# Altium PCB Pcb_Mang_giao_thuc_Iot.pcbdoc
Units mil, origin at the board's own origin, x right, y up, seen from the top; angles counter-clockwise.
Board outline 2700 x 2885 mil, 2 copper layers (Top Layer, Bottom Layer); 14 components, 29 nets, 95 pads, 0 vias.
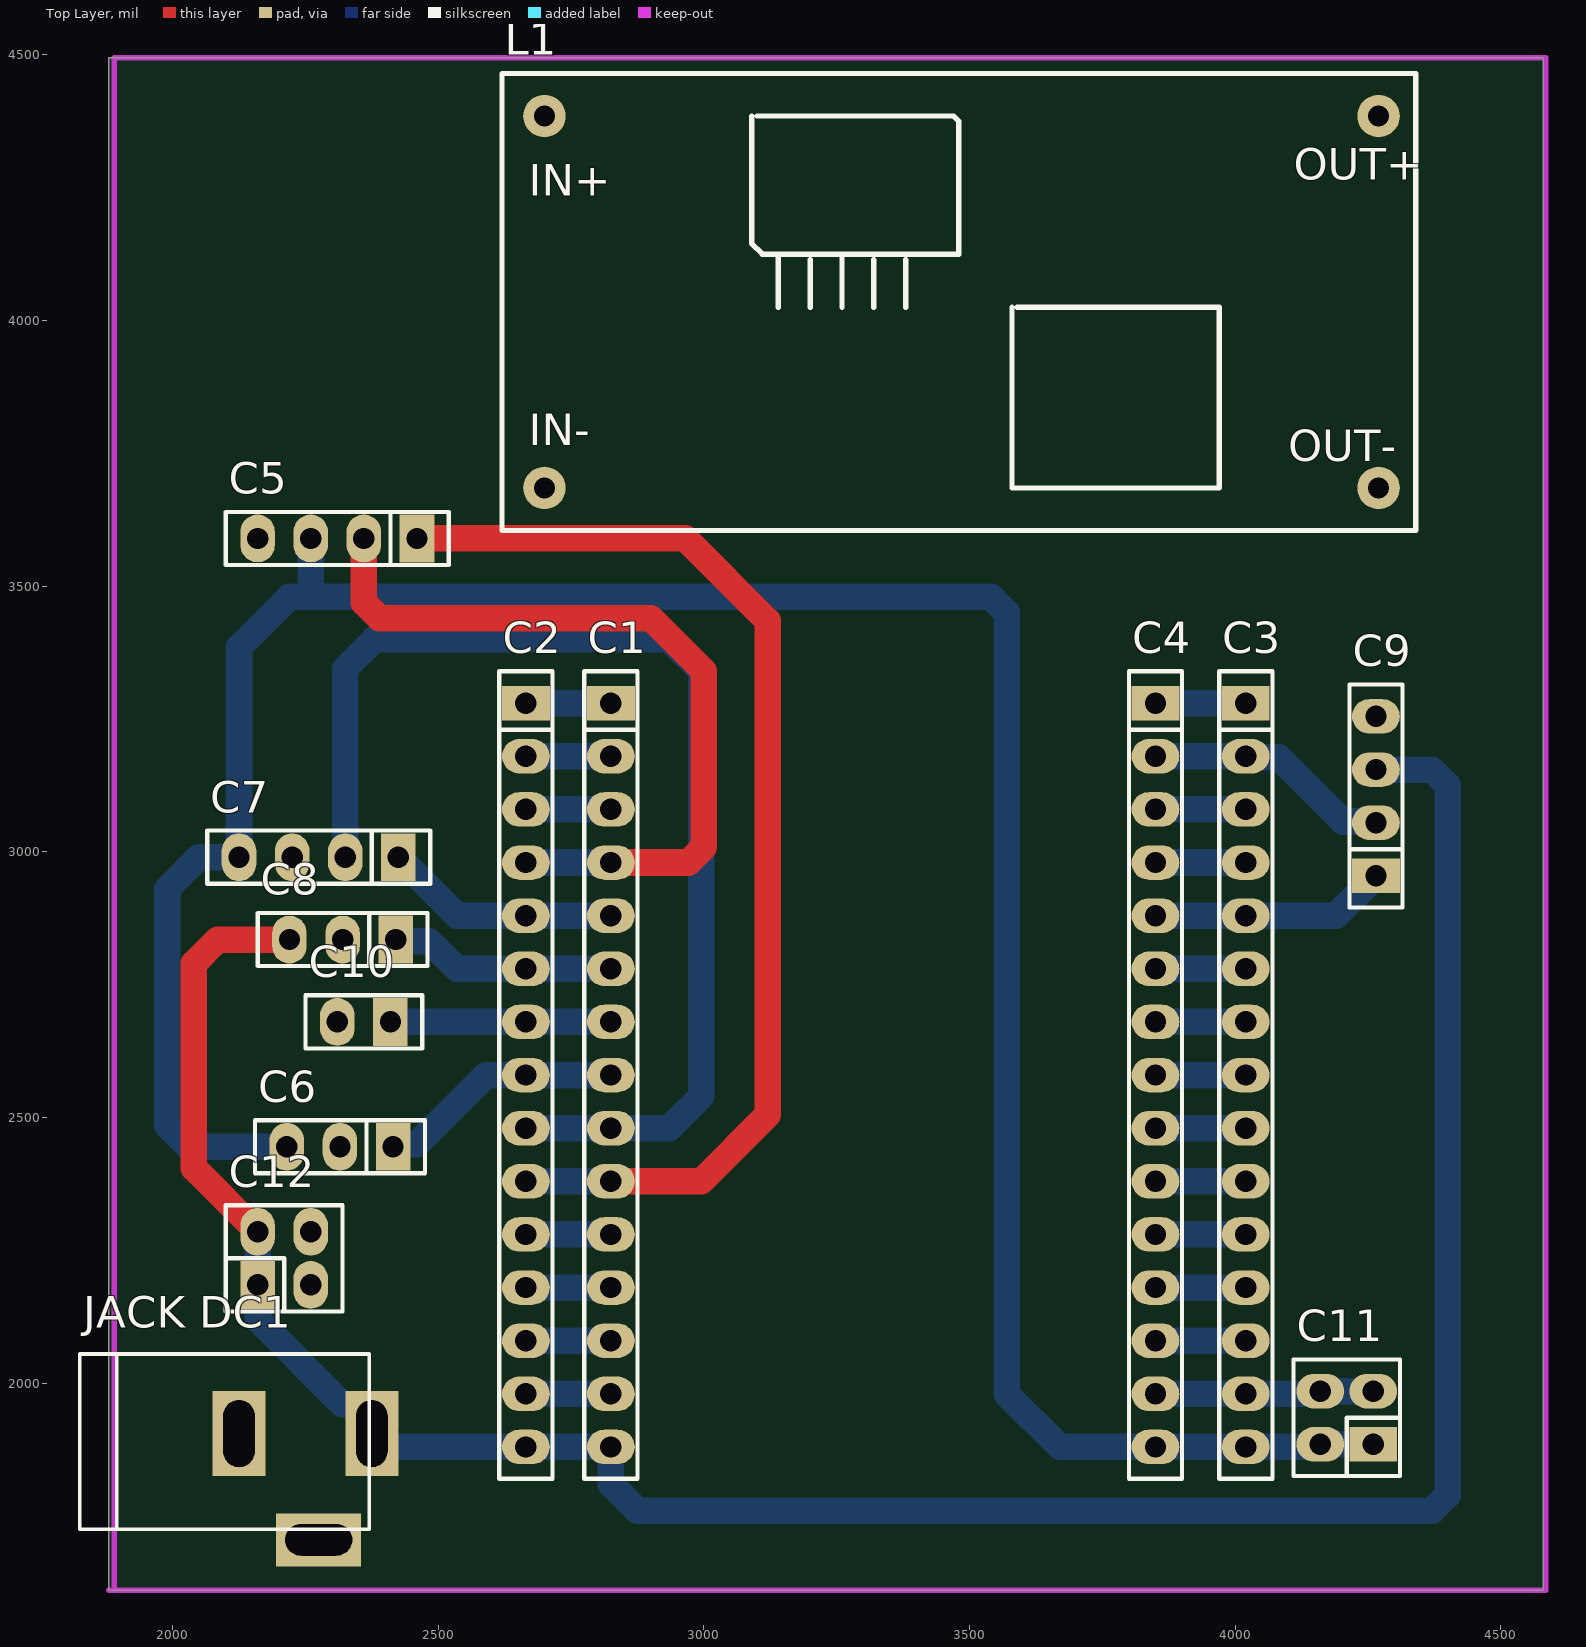
[diagram p0: Top Layer view]
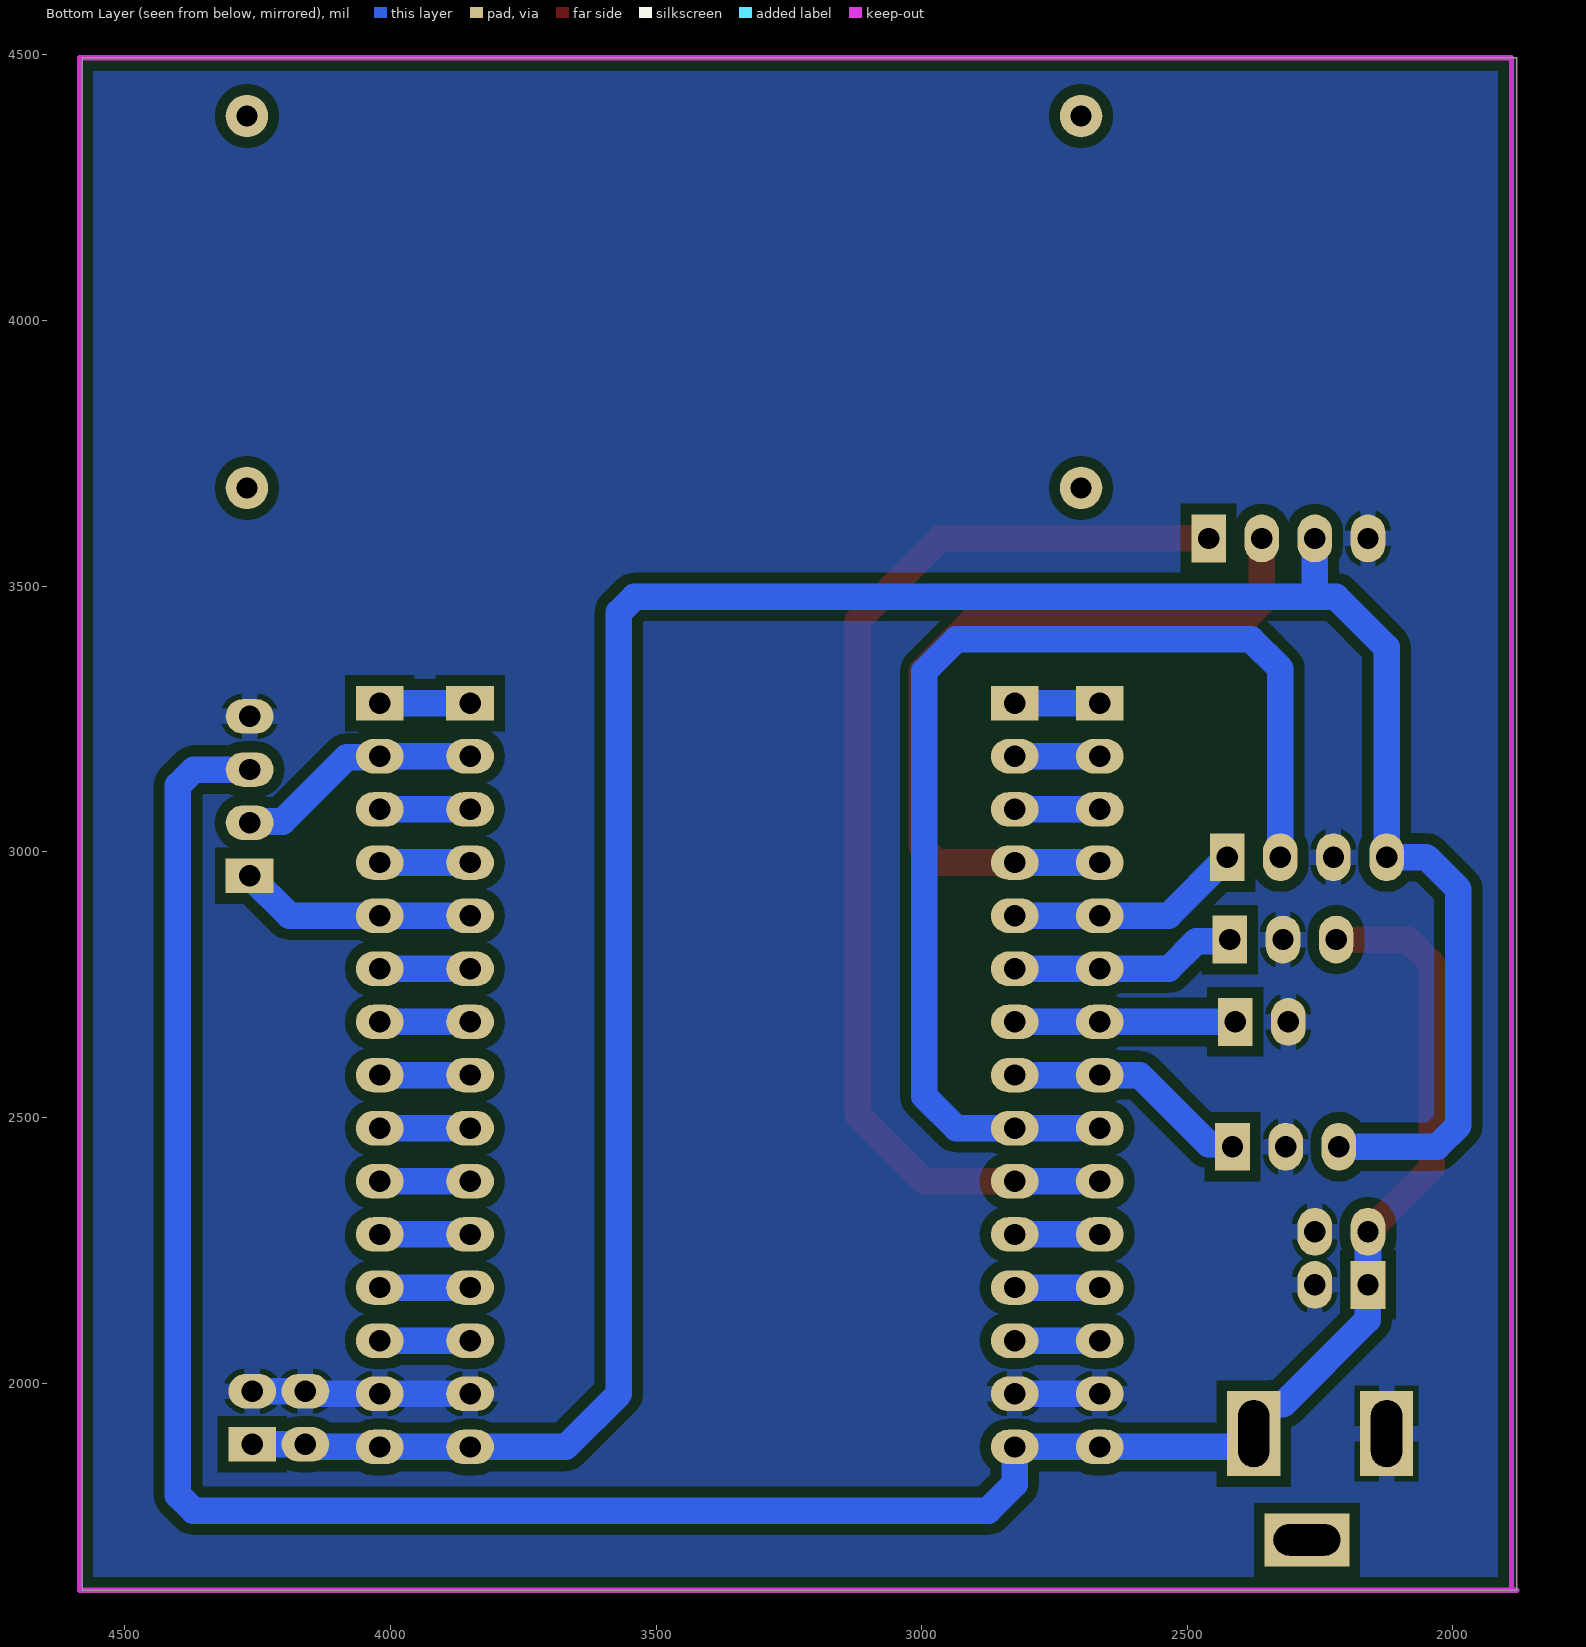
[diagram p1: Bottom Layer view, seen from below]
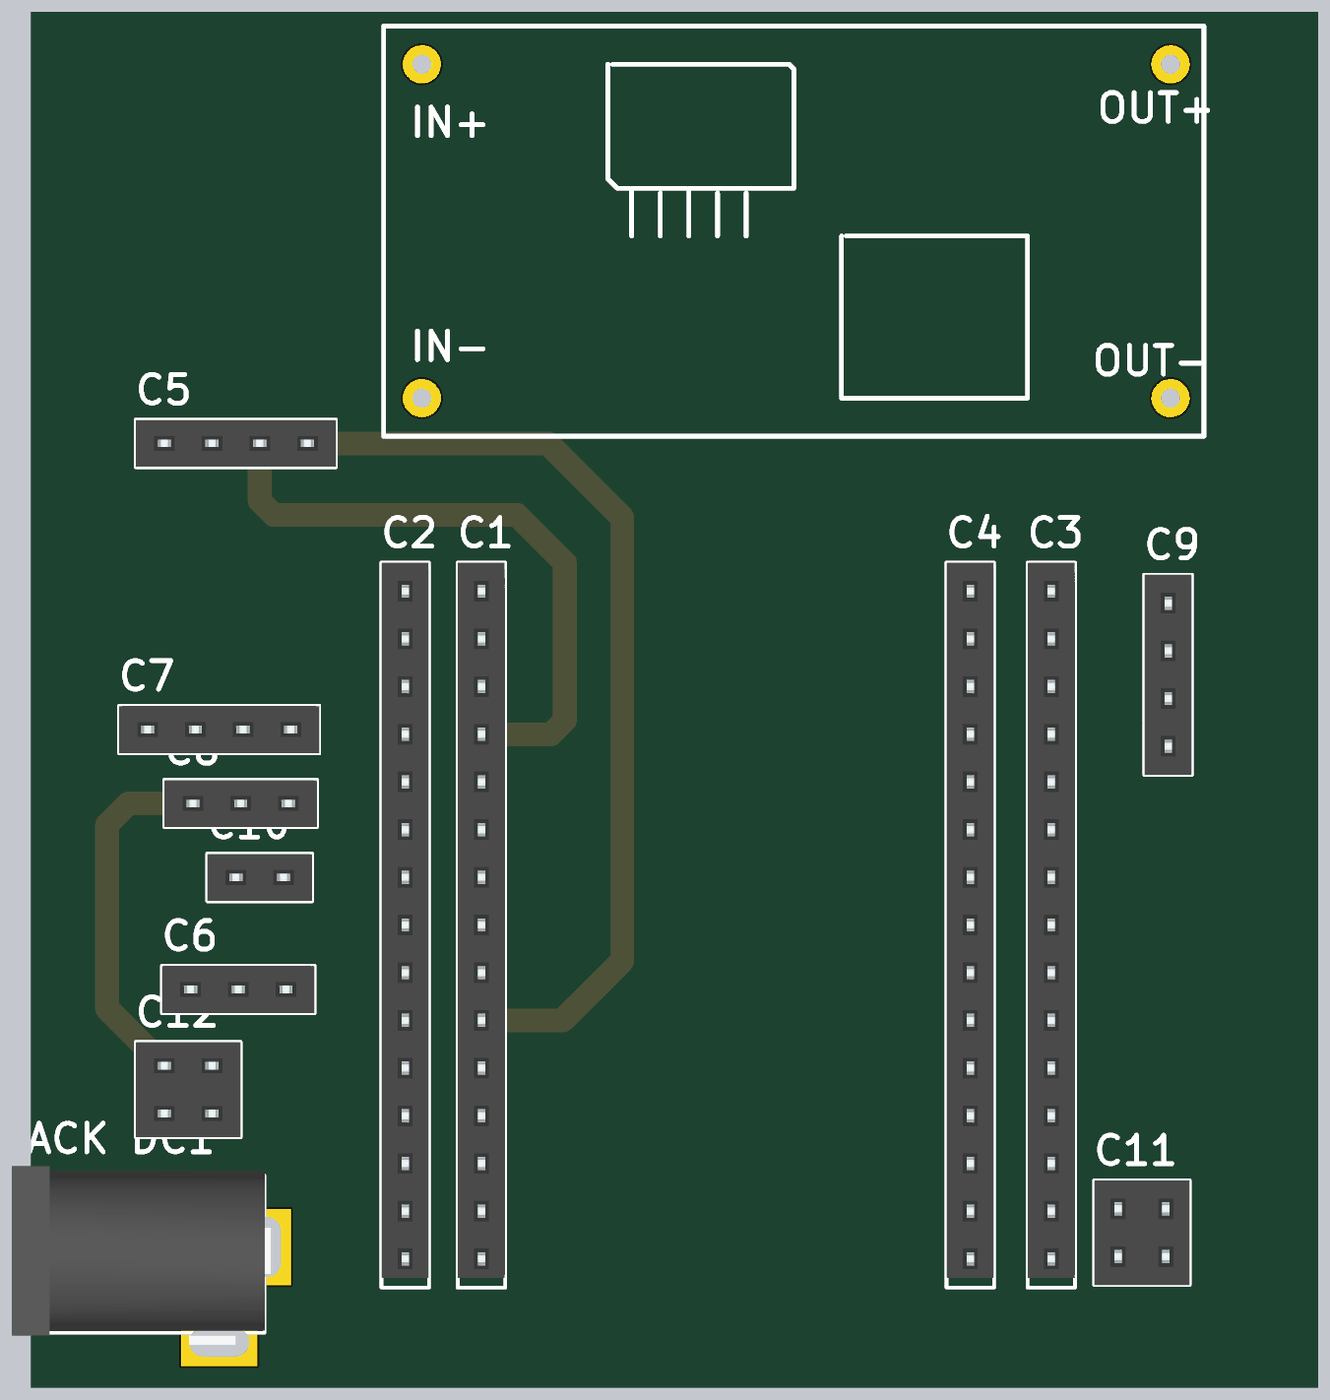
[diagram p2: 3D render of the assembled board from above, using the file's embedded part models]

## Layer stack, top to bottom
Top Solder: solder mask 0.4, Solder Resist, Dk 3.5
Top Layer: signal copper 1.4
Dielectric 1: dielectric 12.6, FR-4, Dk 4.8
Bottom Layer: signal copper 1.4
Bottom Solder: solder mask 0.4, Solder Resist, Dk 3.5

## Board outline
1880,1610 4580,1610 4580,4495 1880,4495

## Design rules (kind name [scope] priority, off if disabled: settings)
Clearance [All] p1: gap=20 ignorepadtopadclearanceinfootprint=FALSE
PlaneConnect [All] p1: planeconnectstyle=Relief reliefexpansion=20 reliefentries=4 reliefconductorwidth=20 reliefairgap=10
PolygonConnect [All] p1: connectstyle=Relief reliefconductorwidth=30 reliefentries=4 polygonreliefangle="90 Angle" airgapwidth=10
RoutingVias [All] p1: holewidth=50 width=70 viastyle="Through Hole" minholewidth=50 minwidth=70 maxholewidth=50 maxwidth=70
SolderMaskExpansion [All] p1: expansion=4 istentingtop=FALSE
Width [All] p1: maxlimit=50 minlimit=20 preferedwidth=30
29 further rules are at their usual default settings.

## Classes and differential pairs
component class Sch_Mang_giao_thuc_Iot: C1 C2 C3 C4 C5 C6 C7 C8 C9 C10 C12 "JACK DC1" L1

## Components (designator, comment, footprint, x,y, rotation, side; value= is the part's Value field where it differs from the comment)
C1 "JP15" JP15-C1T 2825,3280 r270 top
C2 "JP15" JP15-C1T 2665,3280 r270 top
C3 "JP15" JP15-C1T 4020,3280 r270 top
C4 "JP15" JP15-C1T 3850,3280 r270 top
C5 "JP4" JP4-C1T 2460,3590 r180 top
C6 "JP3" JP3-C1T 2415,2445 r180 top
C7 "JP4" JP4-C1T 2425,2990 r180 top
C8 "JP3" JP3-C1T 2420,2835 r180 top
C9 "JP4" JP4-C1T 4265,2955 r90 top
C10 "JP2" JP2-C1T 2410,2680 r180 top
C11 "JP2x2" JP2-C2T 4210,1935 r90 top
C12 "JP2x2" JP2-C2T 2210,2235 r0 top
"JACK DC1" "JACK DC 5.5" "JACK DC 5.5" 2250,1805 r0 top value="Jac DC"
L1 "BUCK_LM2596" BUCK_LM2596 3470,4065 r0 top

## Footprints (in the part's own frame and the unit in brackets; to place one, negate y for a bottom-side part, rotate by r counter-clockwise, add the part's x,y. Pads: shape width x height; smd on the part's side, far side on the other; paste and mask are expansions set on the pad)
BUCK_LM2596 [mil]
  round 80 hole 40: 1(-770,320) 2(-770,-380) 3(800,-380) 4(800,320)
  silkscreen extent -850,-460 870,400
"JACK DC 5.5" [mil] "Jac DC input"
  rect 100x160 hole 59.06 slot 125.98 at 90 deg: 1(125,100) 2(-125,100)
  rect 160x100 hole 59.06 slot 125.98 at 0 deg: 3(25,-100)
  silkscreen extent -425,-80 120,250, body extent -410,-105 134,269, height 434
JP2-C1T [mil] "2 row, straight, gold plating"
  rect 65x90 hole 40.16: 1(0,0)
  oval 65x90 hole 40.16: 2(100,0)
  silkscreen extent -60,-50 160,50, body extent -60,-49 160,49, height 335
JP2-C2T [mil] "4 pins, dual row, straight, gold plating"
  rect 65x90 hole 40.16: 1(-50,-50)
  oval 65x90 hole 40.16: 2(50,-50) 3(50,50) 4(-50,50)
  silkscreen extent -110,-100 110,100, body extent -110,-100 110,100, height 335
JP3-C1T [mil] "3 row, straight, gold plating"
  rect 65x90 hole 40.16: 1(0,0)
  oval 65x90 hole 40.16: 2(100,0) 3(200,0)
  silkscreen extent -60,-50 260,50, body extent -60,-49 260,49, height 335
JP4-C1T [mil] "4 row, straight, gold plating"
  rect 65x90 hole 40.16: 1(0,0)
  oval 65x90 hole 40.16: 2(100,0) 3(200,0) 4(300,0)
  silkscreen extent -60,-50 360,50, body extent -60,-49 360,49, height 335
JP15-C1T [mil] "15 row, straight, gold plating"
  rect 65x90 hole 40.16: 1(0,0)
  oval 65x90 hole 40.16: 2(100,0) 3(200,0) 4(300,0) 5(400,0) 6(500,0) 7(600,0) 8(700,0) 9(800,0) 10(900,0) 11(1000,0) 12(1100,0) 13(1200,0) 14(1300,0) 15(1400,0)
  silkscreen extent -60,-50 1460,50, body extent -60,-49 1440,49, height 335

## Part data
C1 C2 C3 C4: "WR-PHD 2.54 mm Angled Socket Header", Manufacturer="W¨¹rth Elektronik eiSos GmbH", partNo=613015143121, ComponentLink1 Description=Manufacturer, ComponentLink1URL=http://www.we-online.com, ComponentLink2 Description=Datasheet, ComponentLink2URL=http://katalog.we-online.de/em/datasheet/6130xx143121.pdf, Created by="Karrer Zheng", Created Date="29 March 2013", NoPins=15
C5 C7 C9: "WR-PHD 2.54 mm Angled Socket Header", Manufacturer="W¨¹rth Elektronik eiSos GmbH", partNo=613004143121, ComponentLink1 Description=Manufacturer, ComponentLink1URL=http://www.we-online.com, ComponentLink2 Description=Datasheet, ComponentLink2URL=http://katalog.we-online.de/em/datasheet/6130xx143121.pdf, Created by="Karrer Zheng", Created Date="29 March 2013", NoPins=04
C6 C8: "WR-PHD 2.54 mm Angled Socket Header", Manufacturer="W¨¹rth Elektronik eiSos GmbH", partNo=613003143121, ComponentLink1 Description=Manufacturer, ComponentLink1URL=http://www.we-online.com, ComponentLink2 Description=Datasheet, ComponentLink2URL=http://katalog.we-online.de/em/datasheet/6130xx143121.pdf, Created by="Karrer Zheng", Created Date="29 March 2013", NoPins=03
C10: "WR-PHD 2.54 mm Angled Socket Header", Manufacturer="W¨¹rth Elektronik eiSos GmbH", partNo=613002143121, ComponentLink1 Description=Manufacturer, ComponentLink1URL=http://www.we-online.com, ComponentLink2 Description=Datasheet, ComponentLink2URL=http://katalog.we-online.de/em/datasheet/6130xx143121.pdf, Created by="Karrer Zheng", Created Date="29 March 2013", NoPins=02
C11 C12: "WR-PHD 2.54 mm Dual Socket Header", Manufacturer="W¨¹rth Elektronik eiSos GmbH", partNo=61300421821, ComponentLink1 Description=Manufacturer, ComponentLink1URL=http://www.we-online.com, ComponentLink2 Description=Datasheet, ComponentLink2URL=http://katalog.we-online.de/em/datasheet/6130xx21821.pdf, Created by="Karrer Zheng", Created Date="29 March 2013", NoPins=04

## Nets (pads, with @x,y where several pads share a name; then routed paths per layer and width w, separated by ;. In a path a pad name is that pad's centre, name@x,y a point inside that pad or via, vN(x,y) a via of type N, cw(c..) or ccw(c..) an arc to the next point about the centre after c; other vN are vias at no path point)
Analog_AS: C1.4 C2.4 C5.2 | length 1492.1
  Top Layer w50: C5.2 2360,3469.29 2389.29,3440 2900,3440 3000,3340 3000,3009.29 2970.71,2980 C1.4
  Bottom Layer w50: C2.4 C1.4
Analog_MQ2: C1.5 C2.5 C7.1 | length 445.6
  Bottom Layer w50: C7.1 2535,2880 C2.5 C1.5
Coi: C1.7 C2.7 C10.1 | length 415
  Bottom Layer w50: C10.1 C2.7 C1.7
Data_DHT11: C1.8 C2.8 C6.1 | length 465.9
  Bottom Layer w50: C6.1 2419.92,2449.92 2459.92,2449.92 2590,2580 C1.8
Digital_AS: C1.10 C2.10 C5.1 | length 2161
  Top Layer w50: C5.1 2965,3590 3120,3435 3120,2505 2995,2380 C1.10
  Bottom Layer w50: C2.10 C1.10
Digital_MQ2: C1.9 C2.9 C7.2 | length 2227.5
  Bottom Layer w50: C7.2 2325,3345 2380,3400 2935,3400 2995,3340 2995,2540 2935,2480 C1.9 C2.9
Digital_Relay: C1.6 C2.6 C8.1 | length 427.8
  Bottom Layer w50: C8.1 2422.95,2832.05 2482.95,2832.05 2535,2780 C2.6 C1.6
GND: "JACK DC1.2" C1.14 C2.14 C3.14 C4.14 C5.4 C6.2 C7.3 C8.2 C9.4 C10.2 C11.2 C11.3 C12.2 C12.3 | length 572.1
  Bottom Layer w50: C2.14 C1.14 ; C4.14 C3.14 4152.34,1980 4157.34,1985 C11.3 C11.2
NetC1_1: C1.1 C2.1 | length 160
  Bottom Layer w50: C2.1 C1.1
NetC1_2: C1.2 C2.2 | length 160
  Bottom Layer w50: C2.2 C1.2
NetC1_3: C1.3 C2.3 | length 160
  Bottom Layer w50: C2.3 C1.3
NetC1_11: C1.11 C2.11 | length 160
  Bottom Layer w50: C2.11 C1.11
NetC1_12: C1.12 C2.12 | length 160
  Bottom Layer w50: C2.12 C1.12
NetC1_13: C1.13 C2.13 | length 160
  Bottom Layer w50: C2.13 C1.13
NetC3_1: C3.1 C4.1 | length 170
  Bottom Layer w50: C4.1 C3.1
NetC3_3: C3.3 C4.3 | length 170
  Bottom Layer w50: C4.3 C3.3
NetC3_4: C3.4 C4.4 | length 170
  Bottom Layer w50: C4.4 C3.4
NetC3_6: C3.6 C4.6 | length 170
  Bottom Layer w50: C4.6 C3.6
NetC3_7: C3.7 C4.7 | length 170
  Bottom Layer w50: C4.7 C3.7
NetC3_8: C3.8 C4.8 | length 170
  Bottom Layer w50: C4.8 C3.8
NetC3_9: C3.9 C4.9 | length 170
  Bottom Layer w50: C4.9 C3.9
NetC3_10: C3.10 C4.10 | length 170
  Bottom Layer w50: C4.10 C3.10
NetC3_11: C3.11 C4.11 | length 170
  Bottom Layer w50: C4.11 C3.11
NetC3_12: C3.12 C4.12 | length 170
  Bottom Layer w50: C4.12 C3.12
NetC3_13: C3.13 C4.13 | length 170
  Bottom Layer w50: C4.13 C3.13
SCL_LCD: C3.2 C4.2 C9.2 | length 466.8
  Bottom Layer w50: C4.2 C3.2 4022.26,3177.74 4082.26,3177.74 4202.74,3057.26 4262.74,3057.26 C9.2
SDA_LCD: C3.5 C4.5 C9.1 | length 446.1
  Bottom Layer w50: C4.5 C3.5 4190,2880 C9.1
VCC_3V3: C3.15 C4.15 C5.3 C6.3 C7.4 C11.1 C11.4 | length 5052.1
  Bottom Layer w50: C6.3 2030,2445 1990,2485 1990,2930 2050,2990 C7.4 2125,3385 2220,3480 2255,3480 ; C5.3 2260,3485 2255,3480 ; C11.4@4160,1880 C3.15 C4.15 3670,1880 3570,1980 3570,3450.71 3540.71,3480 2255,3480 ; C11.4 C11.1
Vin_5V: "JACK DC1.1" C1.15 C2.15 C8.3 C9.3 C12.1 C12.4 | length 4861.3
  Top Layer w50: C12.4 2040,2405 2040,2790 2085,2835 C8.3
  Bottom Layer w50: C12.4 C12.1 2160.45,2184.55 2160.45,2119.55 2320,1960 2350,1960 2400,1910 2400,1880 C2.15 C1.15 2825,1810 2875,1760 4370.71,1760 4400,1789.29 4400,3125 4370,3155 C9.3
pads on no net: "JACK DC1.3" L1.1 L1.2 L1.3 L1.4

## Polygon pours and split planes (outlines as drawn)
GND on Bottom Layer "GND_L02_P000" (solid, remove dead copper, pour order 0): 1880,4500 1890,4490 4590,4490 4590,1620 4575,1605 1885,1605 1885,4490 1890,4495

## Keep-outs
Keep-Out Layer:
  lines w10: 1880,1610 4585,1610 4585,4495 1890,4495 1890,1610

## Text inside footprints (layer, text, board x,y; h text height)
L1: Top Overlay "IN+" at 2670,4235 h60; Top Overlay "IN-" at 2670,3765 h60; Top Overlay "OUT+" at 4110,4265 h60; Top Overlay "OUT-" at 4100,3735 h60